# EAGLE board Tueroeffner (EAGLE 7.4.0)
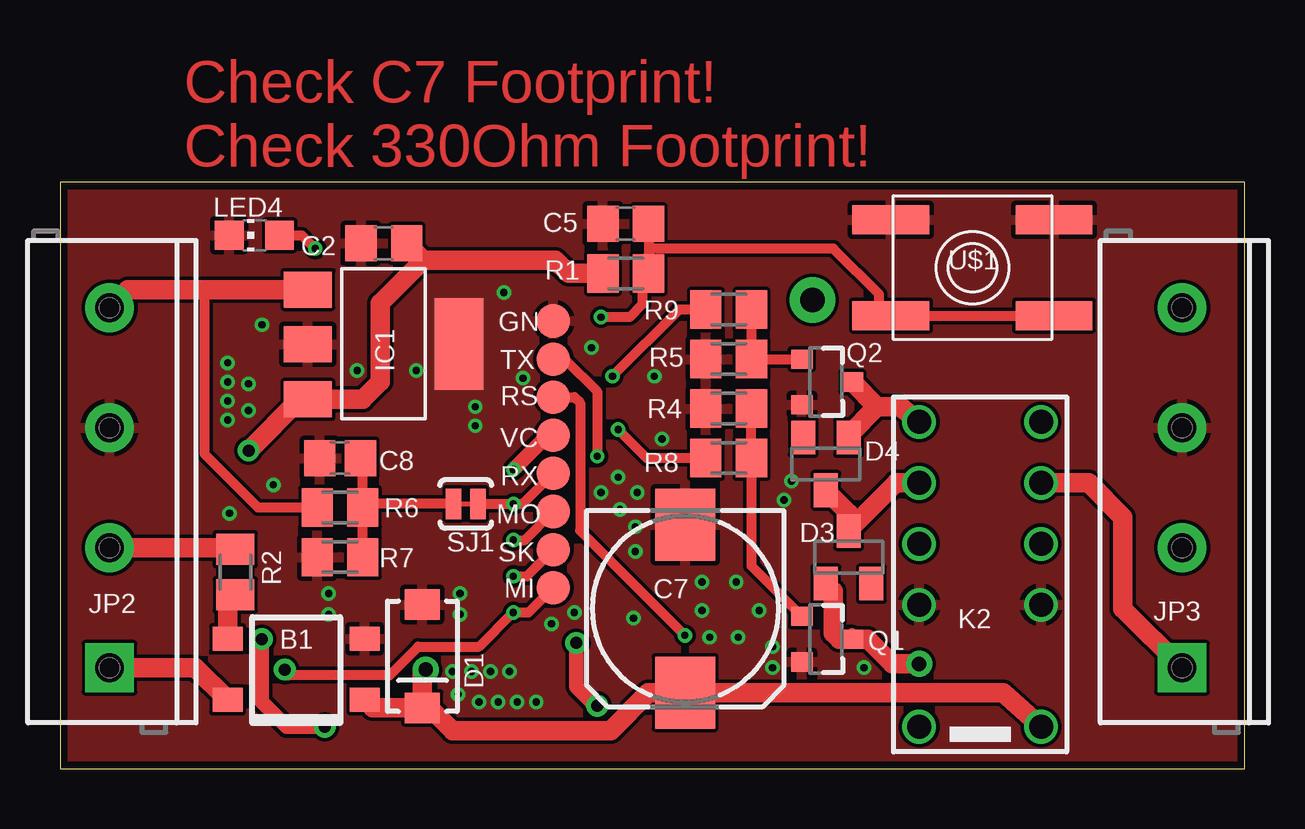
[diagram p0: board, top side]
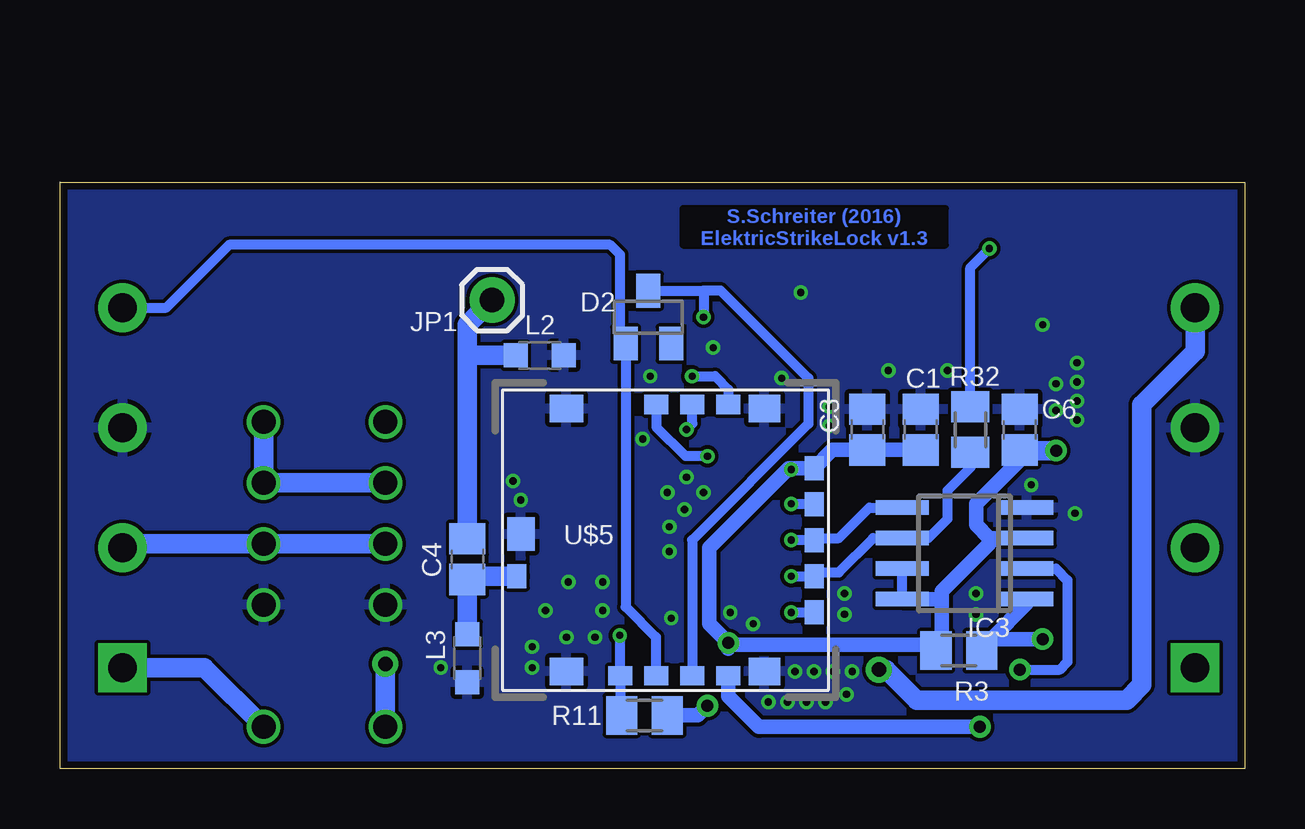
[diagram p1: board, bottom side, seen from below]

Size 49.36 x 24.45 mm. Coordinates in mm from the lower left corner, seen from the top.
Outline: 49.36,24.44 0,24.44 0,0 49.36,0 49.36,24.45
Copper layers (1*16): Top 0.035mm / dielectric 1.5mm / Bottom 0.035mm
Design rules "PCB-POOL Standard *": minimum track width 12mil, minimum drill 0.3mm, track to track 0.15mm, track to pad 0.15mm, pad to pad 0.15mm, via to via 0.15mm, smd to smd 0.15mm, copper to edge 0.3mm, drill to drill 0.2mm, minimum pad ring 0.2mm, minimum via ring 0.15mm, stop-mask expansion 0.075mm, vias tented up to drill 0mil, thermal gap 0.2mm

## Footprints (pad centres in the part's own frame; a part is rotated, then mirrored left to right if it is on the bottom)
TO-269AA = smd 1 x 1.25: + -1.28,-2.855; - 1.28,-2.855; AC1 -1.28,2.855; AC2 1.28,2.855
C2012 = smd 1.3 x 1.5: 1 -0.85,0; 2 0.85,0
C0805 = smd 1.3 x 1.5: 1 -0.95,0; 2 0.95,0
175TMP-0810 = smd 3 x 2.5: + 3.5,0; - -3.5,0
SMA-DIODE = smd 1.27 x 1.47: A -2.15,0; C 2.15,0
SOT23 = smd 1 x 1.4: 1 -0.95,-1.1; 2 0.95,-1.1; 3 0,1.1
TP14R = smd 1.4 x 1.4: TP 0,0
SOT223 = smd 1.499 x 2.007: 1 -2.261,-3.15; 2 0.025,-3.15; 3 2.311,-3.15 | smd 3.81 x 2.007: 4 0,3.15
SO-08 = smd 0.6 x 2.2: 1 -1.905,-2.6; 2 -0.635,-2.6; 3 0.635,-2.6; 4 1.905,-2.6; 5 1.905,2.6; 6 0.635,2.6; 7 -0.635,2.6; 8 -1.905,2.6
1X01 = drill 1.016 pad 1.88: 1 0,0
SCREWTERMINAL-3.5MM-4 = drill 1.2 pad 2.032 square: 1 0,0 | drill 1.2 pad 2.032: 2 5,0; 3 10,0; 4 15,0
TX2-L2 = drill 1: 1 -6.35,-2.54; 3 -1.27,-2.54; 4 1.27,-2.54; 5 3.81,-2.54; 6 6.35,-2.54; 7 6.35,2.54; 8 3.81,2.54; 9 1.27,2.54; 10 -1.27,2.54; 12 -6.35,2.54
L2012C = smd 1 x 1: 1 -1,0; 2 1,0
CHIP-LED0805 = smd 1.2 x 1.2: A 0,-1.05; C 0,1.05
SOT23-3 = smd 0.8 x 0.9: 1 -0.95,-1; 2 0.95,-1; 3 0,1.1
M0805 = smd 1.3 x 1.6: 1 -0.95,0; 2 0.95,0
M2012 = smd 1.3 x 1.6: 1 -0.95,0; 2 0.95,0
SJ_2S-TRACE = smd 0.635 x 1.27: 1 -0.508,0; 2 0.508,0
EVQ-Q2 = smd 3.2 x 1.2: A -3.4,-2; A' 3.4,-2; B -3.4,2; B' 3.4,2
ZM5202_STERN = smd 1.4 x 1.15: 1 4.125,5.475; 16 4.125,-5.475 | smd 1 x 0.8: 2 1.875,5.65; 3 0.375,5.65; 4 -1.125,5.65; 5 -2.625,5.65; 13 -2.625,-5.65; 14 -1.125,-5.65; 15 0.375,-5.65 | smd 1.3 x 1.15: 6 -4.125,5.475; 12 -4.125,-5.475 | smd 0.8 x 1: 7 -6.2,3; 8 -6.2,1.5; 9 -6.2,0; 10 -6.2,-1.5; 11 -6.2,-3; 18 6.2,1.5 | smd 1.15 x 1.4: 17 6.025,-0.25

## Placement (x,y rotation side)
B1  RECTIFIER-S40  [TO-269AA]  9.84,4.14 90 top
C1  100nF  [C2012]  13.49,14.13 90 bottom
C2  10µF  [C0805]  13.49,21.89 180 top
C3  100nF  [C2012]  15.72,14.13 90 bottom
C4  15pF  [C2012]  32.38,8.73 270 bottom
C5  100nF  [C0805]  23.57,22.7 180 top
C6  100nF  [C2012]  9.37,14.13 270 bottom
C7  470µF 25V  [175TMP-0810]  26.05,6.67 270 top
C8  47nF  [C2012]  11.67,12.94 180 top
D1  SMAJ24A  [SMA-DIODE]  15.1,4.68 270 top
D2  PMBD914  [SOT23]  24.84,18.81 0 bottom
D3  PMBD914  [SOT23]  32.86,8.81 0 top
D4  PMBD914  [SOT23]  31.91,12.7 180 top
GN  TPTP14R  [TP14R]  20.56,18.65 0 top
IC1  IFX25001MEV33HTSA1  [SOT223]  13.48,17.7 270 top
IC3  M25PE20  [SO-08]  11.67,8.97 90 bottom
JP1  Z-Antenna  [1X01]  31.35,19.53 180 bottom
JP2  [SCREWTERMINAL-3.5MM-4]  2.06,4.21 90 top
JP3  [SCREWTERMINAL-3.5MM-4]  46.75,4.21 90 top
K2  EC2-12TNU  [TX2-L2]  38.34,8.1 90 top
L2  unpopulated  [L2012C]  29.37,17.22 0 bottom
L3  unpopulated  [L2012C]  32.38,4.6 270 bottom
LED4  RED  [CHIP-LED0805]  8.1,22.22 90 top
MI  TPTP14R  [TP14R]  20.56,7.54 0 top
MO  TPTP14R  [TP14R]  20.56,10.72 0 top
Q1  2N7002CK  [SOT23-3]  31.91,5.4 270 top
Q2  2N7002CK  [SOT23-3]  31.91,16.11 270 top
R1  4.7K  [M0805]  23.57,20.64 180 top
R2  1  [M2012]  7.3,8.19 90 top
R3  10K  [M2012]  11.91,4.92 180 bottom
R4  10K  [M2012]  27.86,15 0 top
R5  10K  [M2012]  27.86,17.07 0 top
R6  180k  [M2012]  11.67,10.87 0 top
R7  20k  [M2012]  11.67,8.81 180 top
R8  100  [M2012]  27.86,12.94 180 top
R9  100  [M2012]  27.86,19.13 180 top
R11  10K  [M2012]  25,2.22 0 bottom
R32  330  [M2012]  11.43,14.13 90 bottom
RS  TPTP14R  [TP14R]  20.56,15.48 0 top
RX  TPTP14R  [TP14R]  20.56,12.3 0 top
SJ1  BATTERY  [SJ_2S-TRACE]  16.91,11.03 0 top
SK  TPTP14R  [TP14R]  20.56,9.13 0 top
TX  TPTP14R  [TP14R]  20.56,17.07 0 top
U$1  T1  [EVQ-Q2]  38.02,20.88 0 top
U$5  ZM5202  [ZM5202_STERN]  24.13,9.53 180 bottom
VC  TPTP14R  [TP14R]  20.56,13.89 0 top

## Library data of the parts
B1 = rectifier
C1 C3 C4 C6 C8 = eagle-ltspice; SPICEMODEL: NONE; SPICEPREFIX: C
C2 C5 C7 R1 = rcl
D1 = SparkFun-DiscreteSemi
D2-D4 = semicon-smd-ipc
GN MI MO RS RX SK TX VC = testpad
IC1 = burr-brown; MPN: REG1118-2.85/2K5G4; OC_FARNELL: unknown; OC_NEWARK: 14M2185
IC3 = 25LC320A; MPN: 25LC320A
JP1-JP3 = SparkFun-Connectors
K2 = relay; MF: AROMAT/ MATSUSHITA; MPN: TX2-L2-12V; OC_FARNELL: 1124060; OC_NEWARK: 64K3213
L2 L3 = eagle-ltspice; SPICEMODEL: NONE; SPICEPREFIX: L
LED4 U$1 = adafruit
Q1 Q2 = SparkFun-DiscreteSemi; PROD_ID: TRANS-00830
R2-R9 R11 R32 = resistor
SJ1 = SparkFun
U$5 = ZM5202

## Nets
AC_5-12V0: JP2.2 R2.2
AC_5-12V1: B1.AC1 JP2.1
ANTENNA: C4.2 L3.1 U$5.18
BUTTON: C5.1 D2.3 R1.1 U$1.A U$1.A' U$5.4
CS: IC3.1 R3.1 U$5.5
DC_5-12V: B1.+ C7.+ D1.C D3.3 D4.3 IC1.1 JP2.4 JP3.1 K2.1 K2.5 K2.6 K2.8 R6.1
GND: B1.- C1.2 C2.2 C3.2 C5.2 C6.1 C7.- C8.2 D1.A GN.TP IC1.2 IC1.4 IC3.4 JP2.3 JP3.3 K2.3 K2.10 L2.2 L3.2 LED4.C Q1.2 Q2.2 R4.1 R5.1 R7.2 U$1.B U$1.B' U$5.1 U$5.6 U$5.12 U$5.16 U$5.17
INT1: D2.1 JP3.4 U$5.3
MISO: IC3.2 MI.TP U$5.7
MOSI: IC3.5 MO.TP U$5.9
N$1: B1.AC2 R2.1
N$2: C8.1 R6.2 R7.1 SJ1.1
N$4: R8.2 U$5.14
N$5: R9.2 U$5.13
N$6: D3.1 K2.12 Q1.3
N$7: D4.1 K2.7 Q2.3
N$28: LED4.A R32.2
N$33: C4.1 JP1.1 L2.1
RELAY: JP3.2 K2.4 K2.9
RELAY0: Q1.1 R4.2 R8.1
RELAY1: Q2.1 R5.2 R9.1
RESET: R11.1 RS.TP U$5.2
RXD: RX.TP SJ1.2 U$5.10
SCK: IC3.6 R32.1 SK.TP U$5.8
TXD: TX.TP U$5.15
VCC-3.3V: C1.1 C2.1 C3.1 C6.2 IC1.3 IC3.3 IC3.7 IC3.8 R1.2 R3.2 R11.2 U$5.11 VC.TP

## Tracks (layer width: path | path; a pad name or v marks a point on that pad's centre or on a via)
AC_5-12V0
  Top 0.813: JP2.2 7.13,9.21 R2.2
AC_5-12V1
  Top 0.813: JP2.1 5.64,4.21 B1.AC1
ANTENNA
  Bottom 0.813: L3.1 C4.2 32.24,8.03 U$5.18
BUTTON  (via drill 0.3)
  Top 0.406: 24.76,20.8 R1.1 | v22.54,18.81 23.73,18.81 24.29,19.37 24.29,20.4 R1.1 | U$1.A' U$1.A 34.13,19.05 34.13,19.76 32.23,21.67 24.6,21.67 24.52,21.43 | C5.1 24.52,21.43 | 24.52,21.43 R1.1
  Bottom 0.406: U$5.4 23.02,3.89 23.02,9.53 18.18,14.37 18.18,16.27 21.83,19.92 22.54,19.92 | D2.3 24.83,19.92 22.54,19.92 | 22.54,19.92 v22.54,18.81
CS  (via drill 0.5)
  Top 0.61: v8.41,5.4 8.41,2.78 9.45,1.75 v11.03,1.75
  Bottom 0.406: 10.56,5.4 R3.1 10.64,5.32
  Bottom 0.61: IC3.1 9.07,6.89 10.56,5.4 v8.41,5.4 | U$5.5 21.5,3.01 20.24,1.75 v11.03,1.75
DC_5-12V  (via drill 0.6)
  Top 0.406: 5.95,19.96 6.03,19.88 6.03,13.1 8.25,10.87 R6.1
  Top 0.813: D4.3 32.86,10.65 D3.3 32.85,9.91 34.85,11.91 K2.8 | IC1.1 5.95,19.96 2.82,19.96 JP2.4 | D1.C 13.03,2.53 B1.+ | D1.C 15.1,3.98 v15.24,4.13 | D1.C 15.41,2.53 16.36,1.59 22.94,1.59 24.52,3.17 C7.+ 39.3,3.17 K2.1 | K2.5 42.86,11.91 44.29,10.48 44.29,6.67 JP3.1
  Bottom 0.813: JP2.4 2.06,17.38 4.29,15.16 4.29,3.49 4.92,2.86 13.65,2.86 14.92,4.13 v15.24,4.13 | K2.8 K2.5 K2.6 | JP3.1 43.34,4.21 K2.1
GND  (via drill 0.3)
  other vias: 23.34,10.79 23.97,10.08 22.54,11.51 23.97,9.05 25.08,13.73 24.77,16.35 18.73,4.05 17.94,4.05 17.14,4.05 16.35,4.05 19.84,2.78 19.05,2.78 18.26,2.78 17.46,2.78 16.59,3.1 23.26,12.14 24.05,11.51 28.26,5.48 29.69,4.21 29.69,5.08 33.5,4.21 30.16,11.19 30.48,11.99 20.48,6.03 16.67,7.3 23.89,6.27 26.75,7.78 28.18,7.78 27.07,5.48 29.13,6.59 26.75,6.59 16.67,6.43 11.19,7.3 7.06,10.64 8.89,11.83 11.19,6.43 17.3,14.29 17.3,15.08 14.84,16.59 12.38,16.59 8.41,18.49 6.98,16.91 6.98,16.11 6.98,15.32 6.98,14.53 7.86,14.92 7.86,16.03 18.49,19.84 19.29,16.27 21.43,6.51 22.15,17.54
  pour Bottom: 0,0 49.69,0 49.69,24.45 0,24.45
  pour Top (rank 2): 0,0 49.69,0 49.69,24.45 0,24.45
  pour Top (rank 2, no thermals): 15.32,19.92 18.02,19.92 18.02,15.48 15.32,15.48
INT1
  Bottom 0.406: U$5.3 24.53,3.9 24.53,5.48 25.79,6.74 D2.1 26.03,17.95 26.03,21.43 26.43,21.83 42.31,21.83 44.93,19.21 JP3.4
MISO  (via drill 0.3, 0.5)
  Top 0.406: v9.37,4.13 9.52,3.89 13.73,3.89 14.92,5.08 17.46,5.08 v18.89,6.51 19.53,6.51 MI.TP
  Bottom 0.406: IC3.2 7.86,8.33 7.38,7.86 7.38,4.44 7.7,4.13 v9.37,4.13 | 17.94,6.51 U$5.7 17.95,6.51 v18.89,6.51
MOSI  (via drill 0.3)
  Top 0.406: v18.89,9.53 19.37,9.53 MO.TP
  Bottom 0.406: IC3.5 15.64,10.87 16.91,9.6 17.85,9.6 U$5.9 v18.89,9.53
N$1
  Top 0.813: B1.AC2 6.99,7.16 R2.1
N$2
  Top 0.406: R7.1 R6.2 | R6.2 12.62,12.84 C8.1 | SJ1.1 12.78,11.03 R6.2
N$4  (via drill 0.3)
  Top 0.406: R8.2 24.45,12.94 v23.26,14.13
  Bottom 0.406: v23.26,14.13 23,14.38 U$5.14
N$5  (via drill 0.3)
  Top 0.406: R9.2 25.8,19.13 v23.02,16.35
  Bottom 0.406: v23.02,16.35 22.07,16.35 21.5,15.79 U$5.13
N$6  (via drill 0.6)
  Top 0.406: Q1.3 33.01,5.66
  Top 0.813: D3.1 32.23,7.4 32.23,5.64 32.46,5.4 Q1.3 33.65,5.4 34.69,4.37 v35.8,4.37
  Bottom 0.813: K2.12 v35.8,4.37
N$7
  Top 0.406: D4.1 32.86,13.9
  Top 0.813: 34.04,15.08 Q2.3 | 32.86,13.9 34.04,15.08 | 34.04,15.08 35,15.08 K2.7
N$28  (via drill 0.3)
  Top 0.406: LED4.A 10.08,22.22 v10.64,21.67
  Bottom 0.406: R32.2 11.43,20.88 v10.64,21.67
N$33
  Bottom 0.813: C4.1 32.38,16.99 | L2.1 32.15,17.22 32.38,16.99 | 32.38,16.99 32.38,18.49 JP1.1
RELAY
  Bottom 0.813: K2.9 K2.4 46.59,9.37 JP3.2
RELAY0
  Top 0.406: R4.2 R8.1 28.81,8.45 Q1.1
RELAY1
  Top 0.406: R9.1 R5.2 Q2.1
RESET  (via drill 0.3)
  Top 0.406: RS.TP 21.43,15.48 21.67,15.24 21.67,9.92 v26.03,5.56
  Bottom 0.406: R11.1 26,2.27 U$5.2 26.03,3.9 v26.03,5.56
RXD  (via drill 0.3)
  Top 0.406: RX.TP 19.29,11.03 v18.89,11.03 SJ1.2
  Bottom 0.406: v18.89,11.03 U$5.10
SCK  (via drill 0.3)
  Top 0.406: v18.89,8.02 19.45,8.02 SK.TP
  Bottom 0.406: v18.89,8.02 U$5.8 17.78,8.18 16.91,8.18 15.48,9.6 IC3.6 13.18,9.6 12.38,10.4 12.38,11.59 11.43,12.54 R32.1
TXD  (via drill 0.3)
  Top 0.406: TX.TP 21.03,17.07 22.38,15.72 v22.38,13.02
  Bottom 0.406: U$5.15 24.5,14.23 23.29,13.02 v22.38,13.02
VCC-3.3V  (via drill 0.3, 0.5)
  Top 0.406: v22.38,2.62 22.3,2.62
  Top 0.61: VC.TP 20.32,13.89 v18.89,12.46 | v21.51,5.24 21.51,3.41 22.3,2.62
  Top 0.813: v7.86,13.26 9.99,15.39 IC1.3 12.61,15.39 13.33,16.11 13.33,19.39 15.14,21.19 | 15.14,21.19 C2.1 | 15.14,21.19 20.64,21.19 21.19,20.64 R1.2
  Bottom 0.406: IC3.8 IC3.7 | 18.89,12.53 18.99,12.53 | v21.51,5.24 21.51,5 | 12.62,5.16 R3.2
  Bottom 0.61: IC3.3 10.64,9.6 | 21.43,5.16 12.7,5.16 R3.2 | 18.99,12.53 22.3,9.21 22.3,6.03 21.43,5.16 | 21.51,5 21.43,5.16 | v18.89,12.46 18.89,12.53 U$5.11 17.18,13.28 C3.1 C1.1 | R11.2 22.78,2.22 v22.38,2.62 | 12.62,7.06 12.62,7.38 10.64,9.37 10.64,9.6 | 12.62,7.06 12.62,5.16 | 10.64,9.6 11.19,10.16 11.19,11.03 9.37,12.86 C6.2 | IC3.8 12.62,7.06
  Bottom 0.813: C6.2 9.34,13.26 v7.86,13.26

## Text on the board
Top: Check C7 Footprint! / Check 330Ohm Footprint!
Bottom: S.Schreiter (2016) / ElektricStrikeLock v1.3